# EAGLE board RefOsc10MHz_3V0 (EAGLE 7.2.0)
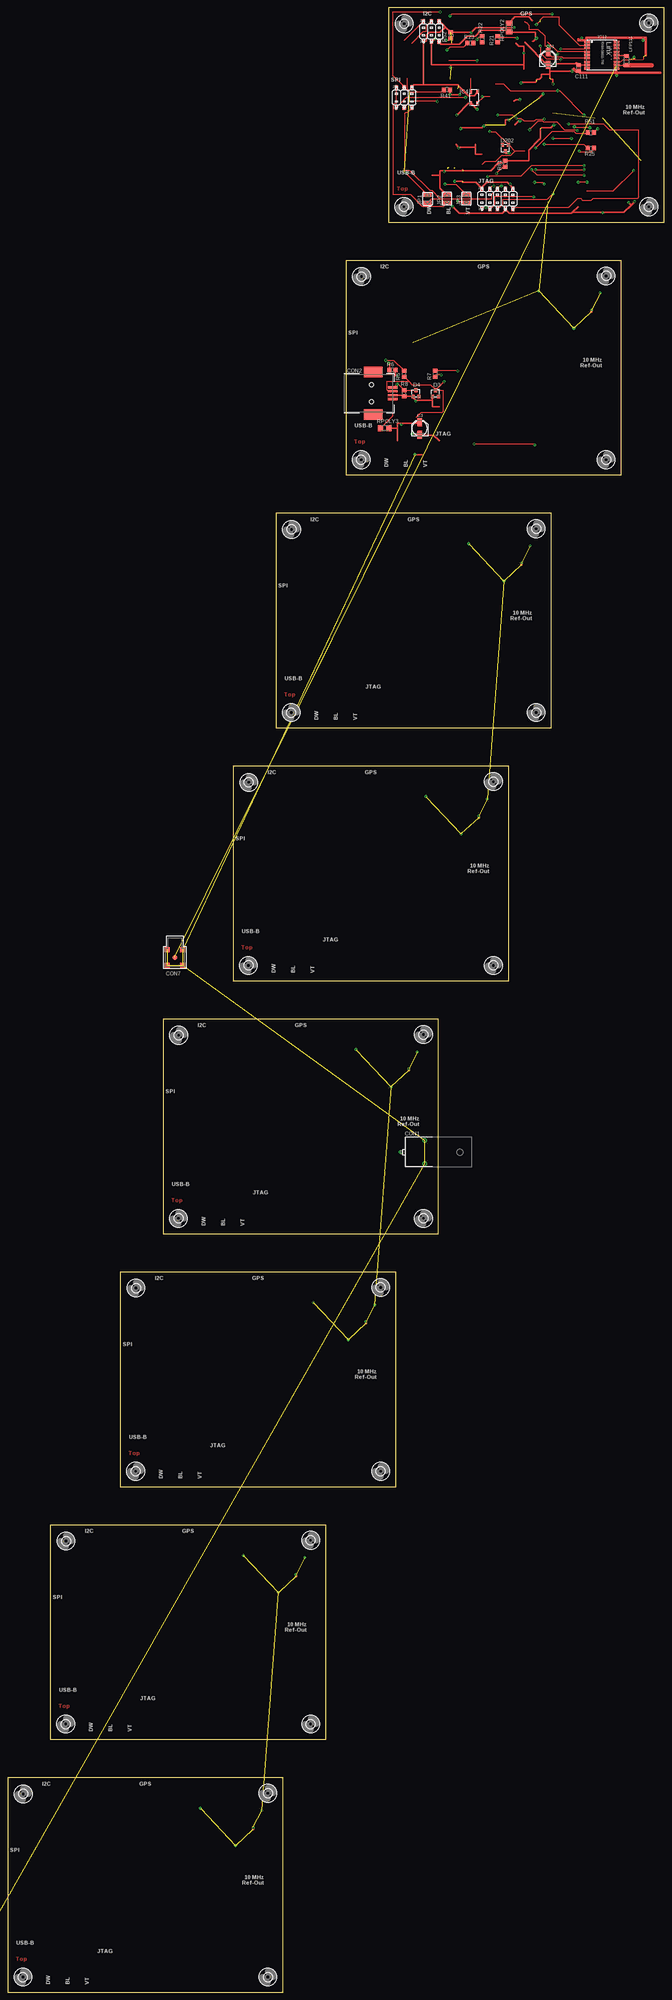
[diagram p0: board, top side]
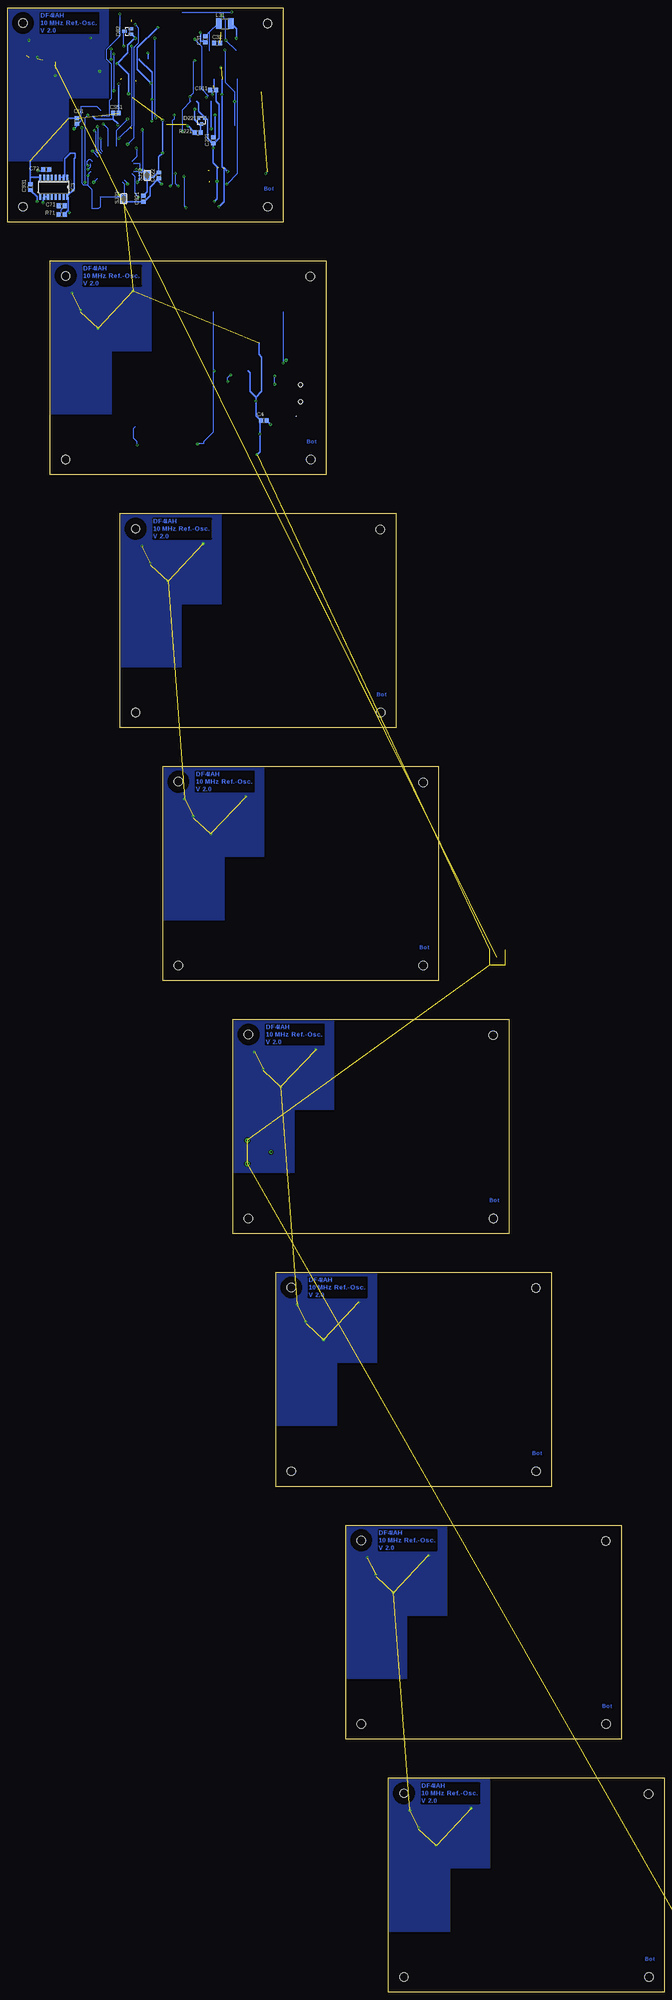
[diagram p1: board, bottom side, seen from below]

Size 214.46 x 647.85 mm. Coordinates in mm from the lower left corner, seen from the top.
Outline: 124.46,577.85 214.46,577.85 214.46,647.85 124.46,647.85 124.46,577.85
Outline: 110.49,495.3 200.49,495.3 200.49,565.3 110.49,565.3 110.49,495.3
Outline: 87.63,412.75 177.63,412.75 177.63,482.75 87.63,482.75 87.63,412.75
Outline: 73.66,330.2 163.66,330.2 163.66,400.2 73.66,400.2 73.66,330.2
Outline: 50.8,247.65 140.8,247.65 140.8,317.65 50.8,317.65 50.8,247.65
Outline: 36.83,165.1 126.83,165.1 126.83,235.1 36.83,235.1 36.83,165.1
Outline: 13.97,82.55 103.97,82.55 103.97,152.55 13.97,152.55 13.97,82.55
Outline: 0,0 90,0 90,70 0,70 0,0
Copper layers (1*16): Top 0.035mm / dielectric 1.5mm / Bottom 0.035mm
Design rules "HSMA_20150114": minimum track width 0.3mm, minimum drill 0.35mm, track to track 0.3mm, track to pad 0.3mm, pad to pad 0.3mm, via to via 0.3mm, smd to smd 0mil, copper to edge 0.3mm, drill to drill 0.35mm, minimum pad ring 0.3mm, minimum via ring 0.25mm, stop-mask expansion 0mil, vias tented up to drill 0.45mm, thermal gap 0.3mm
Net classes: 1 PWR_LOW: width 0.508 mm; 2 PWR_MED: width 0.635 mm; 3 PWR_HI: width 0.762 mm; 4 PAIR_50R: width 2.819 mm, clearance 5.08 mm; 5 PAIR_100R: width 1.143 mm, clearance 3.81 mm; 6 CLK: clearance 1.27 mm
bRestrict: area 174,589.3 to 186.7,602; area 194.3,588 to 204.5,590.6; area 160,506.7 to 172.7,519.4; area 180.3,505.5 to 190.5,508; area 137.2,424.2 to 149.9,436.9; area 157.5,422.9 to 167.6,425.5; area 123.2,341.6 to 135.9,354.3; area 143.5,340.4 to 153.7,342.9; area 100.3,259.1 to 113,271.8; area 120.6,257.8 to 130.8,260.4; area 86.4,176.5 to 99.1,189.2; area 106.7,175.3 to 116.8,177.8; area 63.5,94 to 76.2,106.7; area 83.8,92.7 to 94,95.2; area 49.5,11.4 to 62.2,24.1; area 69.8,10.2 to 80,12.7

## Footprints (pad centres in the part's own frame; a part is rotated, then mirrored left to right if it is on the bottom)
PANASONIC_C = smd 2.6 x 1.4: + 2.05,0; - -2.05,0
C0805 = smd 1.3 x 1.5: 1 -0.95,0; 2 0.95,0
MOLEX_BNC-JACK-50R_SD-73100-0105 = drill 0.46: 1 12.4,0 | drill 0.9: 2 4.6,3.8; 3 4.6,-3.8
TYCO-AMP_USB-B_SMT = smd 6.04 x 3.4: 0A 0,6.92; 0B 0,-6.92 | smd 3 x 0.7: 1 -6.42,1.87; 2 -6.42,-0.62; 3 -6.42,-1.87; 4 -6.42,0.62 | hole 1.4: 0.58,-2.75; 0.58,2.75
MCX-J-P-X-RA-SM1 = smd 1.6 x 1.6: 1 0,0; 2 -2.54,2.54; 3 2.54,2.54; 4 -2.54,-2.54; 5 2.54,-2.54
2X3SMD = smd 1 x 1.5: 1 -2.54,-3.25; 2 -2.54,3.25; 3 0,-3.25; 4 0,3.25; 5 2.54,-3.25; 6 2.54,3.25
2X5SMD = smd 1 x 1.5: 1 -5.08,-3.25; 2 -5.08,3.25; 3 -2.54,-3.25; 4 -2.54,3.25; 5 0,-3.25; 6 0,3.25; 7 2.54,-3.25; 8 2.54,3.25; 9 5.08,-3.25; 10 5.08,3.25
2X03SMD = smd 1 x 1.5: 1 -2.54,-3.25; 2 -2.54,3.25; 3 0,-3.25; 4 0,3.25; 5 2.54,-3.25; 6 2.54,3.25
TO236 = smd 1 x 1.2: A -1,-1; C 0,1; NC 1,-1
SOT23 = smd 1 x 1.4: 1 -0.95,-1.1; 2 0.95,-1.1; 3 0,1.1
SO16 = smd 0.66 x 2.032: 1 -4.445,-3.073; 2 -3.175,-3.073; 3 -1.905,-3.073; 4 -0.635,-3.073; 5 0.635,-3.073; 6 1.905,-3.073; 7 3.175,-3.073; 8 4.445,-3.073; 9 4.445,3.073; 10 3.175,3.073; 11 1.905,3.073; 12 0.635,3.073; 13 -0.635,3.073; 14 -1.905,3.073; 15 -3.175,3.073; 16 -4.445,3.073
CFPT-141 = smd 1.4 x 0.9: 1 -1.9,-1.15; 2 1.9,-1.15; 3 1.9,1.15; 4 -1.9,1.15
712-RXM-GNSS-TM-B = smd 1.803 x 0.711: 1 -4.847,4.369; 2 -4.847,3.277; 3 -4.847,2.184; 4 -4.847,1.092; 5 -4.847,0; 6 -4.847,-1.092; 7 -4.847,-2.184; 8 -4.847,-3.277; 9 -4.847,-4.369; 10 4.847,-4.369; 11 4.847,-3.277; 12 4.847,-2.184; 13 4.847,-1.092; 14 4.847,0; 15 4.847,1.092; 16 4.847,2.184; 17 4.847,3.277; 18 4.847,4.369
SJW = smd 1.27 x 2.54: 1 -1.27,0; 2 1.27,0
L1812 = smd 1.9 x 3.4: 1 -1.95,0; 2 1.95,0
L3216C = smd 1.2 x 1.6: 1 -1.5,0; 2 1.5,0
R0805 = smd 1.3 x 1.5: 1 -0.95,0; 2 0.95,0
M1206 = smd 1.6 x 2: 1 -1.4,0; 2 1.4,0
SJ = smd 1.168 x 1.6: 1 -0.762,0; 2 0.762,0
TQ144 = smd 1.6 x 0.3: P1 -11.1,8.75; P2 -11.1,8.25; P3 -11.1,7.75; P4 -11.1,7.25; P5 -11.1,6.75; P6 -11.1,6.25; P7 -11.1,5.75; P8 -11.1,5.25; P9 -11.1,4.75; P10 -11.1,4.25; P11 -11.1,3.75; P12 -11.1,3.25; P13 -11.1,2.75; P14 -11.1,2.25; P15 -11.1,1.75; P16 -11.1,1.25; P17 -11.1,0.75; P18 -11.1,0.25; P19 -11.1,-0.25; P20 -11.1,-0.75; P21 -11.1,-1.25; P22 -11.1,-1.75; P23 -11.1,-2.25; P24 -11.1,-2.75; P25 -11.1,-3.25; P26 -11.1,-3.75; P27 -11.1,-4.25; P28 -11.1,-4.75; P29 -11.1,-5.25; P30 -11.1,-5.75; P31 -11.1,-6.25; P32 -11.1,-6.75; P33 -11.1,-7.25; P34 -11.1,-7.75; P35 -11.1,-8.25; P36 -11.1,-8.75; P73 11.1,-8.75; P74 11.1,-8.25; P75 11.1,-7.75; P76 11.1,-7.25; P77 11.1,-6.75; P78 11.1,-6.25; P79 11.1,-5.75; P80 11.1,-5.25; P81 11.1,-4.75; P82 11.1,-4.25; P83 11.1,-3.75; P84 11.1,-3.25; P85 11.1,-2.75; P86 11.1,-2.25; P87 11.1,-1.75; P88 11.1,-1.25; P89 11.1,-0.75; P90 11.1,-0.25; P91 11.1,0.25; P92 11.1,0.75; P93 11.1,1.25; P94 11.1,1.75; P95 11.1,2.25; P96 11.1,2.75; P97 11.1,3.25; P98 11.1,3.75; P99 11.1,4.25; P100 11.1,4.75; P101 11.1,5.25; P102 11.1,5.75; P103 11.1,6.25; P104 11.1,6.75; P105 11.1,7.25; P106 11.1,7.75; P107 11.1,8.25; P108 11.1,8.75 | smd 0.3 x 1.6: P37 -8.75,-11.1; P38 -8.25,-11.1; P39 -7.75,-11.1; P40 -7.25,-11.1; P41 -6.75,-11.1; P42 -6.25,-11.1; P43 -5.75,-11.1; P44 -5.25,-11.1; P45 -4.75,-11.1; P46 -4.25,-11.1; P47 -3.75,-11.1; P48 -3.25,-11.1; P49 -2.75,-11.1; P50 -2.25,-11.1; P51 -1.75,-11.1; P52 -1.25,-11.1; P53 -0.75,-11.1; P54 -0.25,-11.1; P55 0.25,-11.1; P56 0.75,-11.1; P57 1.25,-11.1; P58 1.75,-11.1; P59 2.25,-11.1; P60 2.75,-11.1; P61 3.25,-11.1; P62 3.75,-11.1; P63 4.25,-11.1; P64 4.75,-11.1; P65 5.25,-11.1; P66 5.75,-11.1; P67 6.25,-11.1; P68 6.75,-11.1; P69 7.25,-11.1; P70 7.75,-11.1; P71 8.25,-11.1; P72 8.75,-11.1; P109 8.75,11.1; P110 8.25,11.1; P111 7.75,11.1; P112 7.25,11.1; P113 6.75,11.1; P114 6.25,11.1; P115 5.75,11.1; P116 5.25,11.1; P117 4.75,11.1; P118 4.25,11.1; P119 3.75,11.1; P120 3.25,11.1; P121 2.75,11.1; P122 2.25,11.1; P123 1.75,11.1; P124 1.25,11.1; P125 0.75,11.1; P126 0.25,11.1; P127 -0.25,11.1; P128 -0.75,11.1; P129 -1.25,11.1; P130 -1.75,11.1; P131 -2.25,11.1; P132 -2.75,11.1; P133 -3.25,11.1; P134 -3.75,11.1; P135 -4.25,11.1; P136 -4.75,11.1; P137 -5.25,11.1; P138 -5.75,11.1; P139 -6.25,11.1; P140 -6.75,11.1; P141 -7.25,11.1; P142 -7.75,11.1; P143 -8.25,11.1; P144 -8.75,11.1
2,8 = hole 2.8: 0,0

## Placement (x,y rotation side)
C3  47uF  [PANASONIC_C]  134.62,510.54 90 top
C4  100n  [C0805]  130.81,513.08 180 bottom
C31  100n  [C0805]  149.86,637.54 90 bottom
C32  100p  [C0805]  146.05,636.27 0 bottom
C51  10n  [C0805]  191.77,610.87 90 bottom
C71  10p  [C0805]  196.85,583.18 0 bottom
C72  33p  [C0805]  201.87,594.96 180 bottom
C81  0.22F  [PANASONIC_C]  176.53,631.19 90 top
C111  100n  [C0805]  186.45,628.15 270 top
C221  100n  [C0805]  147.32,604.52 270 bottom
C911  10n  [C0805]  147.32,621.03 0 bottom
C921  10n  [C0805]  170.18,585.47 270 bottom
C922  10n  [C0805]  165.1,593.09 270 bottom
C931  10n  [C0805]  207.01,589.28 90 bottom
C951  10n  [C0805]  179.07,613.41 0 bottom
CON1  SD-73100-0105  [MOLEX_BNC-JACK-50R_SD-73100-0105]  140.8,274.27 180 top
CON2  TYCO-AMP_USBUSB-B_SMT  [TYCO-AMP_USB-B_SMT]  119.38,521.97 180 top
CON3  MCX-J-P-X-RA-SM1  [MCX-J-P-X-RA-SM1]  -19.05,0 0 top  (outside the outline)
CON4  AVR-ISP-6SMD  [2X3SMD]  129.54,618.49 0 top
CON5  AVR-JTAG-10SMD  [2X5SMD]  160.02,585.47 0 top
CON6  HEADER-2X3SMD  [2X03SMD]  138.43,640.08 0 top
CON7  MCX-J-P-X-RA-SM1  [MCX-J-P-X-RA-SM1]  54.61,337.82 0 top
CON8  MCX-J-P-X-RA-SM1  [MCX-J-P-X-RA-SM1]  -27.94,0 0 top  (outside the outline)
CON9  MCX-J-P-X-RA-SM1  [MCX-J-P-X-RA-SM1]  -36.83,0 0 top  (outside the outline)
CON10  MCX-J-P-X-RA-SM1  [MCX-J-P-X-RA-SM1]  -45.72,0 0 top  (outside the outline)
D3  BZX84-C3V6  [TO236]  139.7,521.97 0 top
D4  BZX84-C3V6  [TO236]  133.35,521.97 0 top
D82  CRS08  [SOT23]  175.26,640.08 90 bottom
D202  BZX84-C2V7  [TO236]  162.56,601.98 180 top
D221  BZX84-C3V0  [TO236]  151.13,610.87 180 bottom
IC3  74HCT221D  [SO16]  199.39,589.28 180 bottom
IC4  CFPT-141  [CFPT-141]  152.4,618.49 90 top
IC11  712-RXM-GNSS-TM-B  [712-RXM-GNSS-TM-B]  194.1,632.38 0 top
JP1  [SJW]  137.16,585.47 270 top
JP2  [SJW]  143.51,585.47 90 top
JP3  [SJW]  149.86,585.47 90 top
L31  10uH  [L1812]  143.51,642.62 0 bottom
LFP111  WE-CBF_300R  [L3216C]  202.07,630.62 270 top
R5  68  [R0805]  129.54,528.32 90 top
R6  68  [R0805]  125.73,529.59 180 top
R7  1.5k  [R0805]  139.7,528.32 90 top
R8  1M  [R0805]  129.54,521.97 90 top
R10  51  [R0805]  -46.99,-35.56 0 top  (outside the outline)
R21  2.7k  [R0805]  160.02,637.54 90 top
R22  2.7k  [R0805]  154.94,637.54 270 top
R23  2.7k  [R0805]  151.13,636.27 180 top
R25  2.7k  [R0805]  190.5,601.98 0 top
R41  12k  [R0805]  143.51,621.03 180 top
R51  1k  [R0805]  190.5,607.06 0 top
R52  1k  [R0805]  144.78,638.81 270 top
R71  1.5k  [R0805]  196.85,580.39 0 bottom
R81  1k  [R0805]  162.56,596.9 90 top
R221  56  [R0805]  152.4,607.06 0 bottom
RPOLY2  1206L012WR_0.1A  [M1206]  163.83,641.35 270 top
RPOLY3  1206L025YR_0.5A  [M1206]  123.19,510.54 0 top
SJ21  [SJ]  176.53,585.47 90 bottom
SJ22  [SJ]  168.91,593.09 270 bottom
U1  6SLX4TQG144  [TQ144]  -36.83,-50.8 0 top  (outside the outline)
U$1  [2,8]  209.46,642.85 0 top
U$2  [2,8]  209.46,582.85 0 top
U$3  [2,8]  129.46,582.85 180 top
U$4  [2,8]  129.54,642.62 0 top
U$5  [2,8]  195.49,560.3 0 top
U$6  [2,8]  195.49,500.3 0 top
U$7  [2,8]  115.49,500.3 180 top
U$8  [2,8]  115.57,560.07 0 top
U$9  [2,8]  172.63,477.75 0 top
U$10  [2,8]  172.63,417.75 0 top
U$11  [2,8]  92.63,417.75 180 top
U$12  [2,8]  92.71,477.52 0 top
U$13  [2,8]  158.66,395.2 0 top
U$14  [2,8]  158.66,335.2 0 top
U$15  [2,8]  78.66,335.2 180 top
U$16  [2,8]  78.74,394.97 0 top
U$17  [2,8]  135.8,312.65 0 top
U$18  [2,8]  135.8,252.65 0 top
U$19  [2,8]  55.8,252.65 180 top
U$20  [2,8]  55.88,312.42 0 top
U$21  [2,8]  121.83,230.1 0 top
U$22  [2,8]  121.83,170.1 0 top
U$23  [2,8]  41.83,170.1 180 top
U$24  [2,8]  41.91,229.87 0 top
U$25  [2,8]  98.97,147.55 0 top
U$26  [2,8]  98.97,87.55 0 top
U$27  [2,8]  18.97,87.55 180 top
U$28  [2,8]  19.05,147.32 0 top
U$29  [2,8]  85,65 0 top
U$30  [2,8]  85,5 0 top
U$31  [2,8]  5,5 180 top
U$32  [2,8]  5.08,64.77 0 top

## Library data of the parts
C3 C4 C31 C32 C51 C71 C72 C81 C221 C911 C921 C922 C931 C951 L31 R5-R8 R10 R21-R23 R25 R41 R51 R52 R71 R81 R221 RPOLY2 RPOLY3 = rcl
C111 CON3 CON5-CON10 IC11 LFP111 = df4iah
CON1 = df4iah; MF: MOLEX; MPN: SD-73100-0105; OC_FARNELL: 1909203; OC_NEWARK: -
CON2 = df4iah; MF: TYCO-AMP; MPN: 1734346; OC_FARNELL: 1321918
CON4 = atmel-1
D3 D4 D82 D202 D221 = diode
IC3 = 74xx-eu
IC4 = df4iah; MF: IQD-FREQUENCY-PRODUCTS; MPN: LFTVXO022175; OC_FARNELL: 1100745; OC_NEWARK: -
JP1-JP3 SJ21 SJ22 = jumper
U1 = xilinx_devices_V6
U$1-U$32 = holes

## Nets
14 [PWR_HI]: IC11.14 LFP111.1
+3V0 [PWR_LOW]: C221.1 D221.C IC4.4 R221.2
+3V3 [PWR_LOW]: C921.1 C922.1 CON6.5 D82.1 D202.C R221.1 RPOLY2.2 SJ22.2
ADC_PHASE: R52.2
ADC_PHASE_PULLHOLD: C51.1 R51.2
AREF: C32.1
AVCC: C31.2 L31.1
CPLD_GPS_NMEA_TX: R25.2
GND [PWR_HI]: C3.- C4.2 C31.1 C32.2 C51.2 C81.- C111.2 C221.2 C911.2 C921.2 C922.2 C931.2 C951.2 CON1.2 CON1.3 CON2.4 CON3.2 CON3.3 CON3.4 CON3.5 CON4.6 CON5.2 CON5.10 CON6.1 CON6.6 CON7.2 CON7.3 CON7.4 CON7.5 CON8.2 CON8.3 CON8.4 CON8.5 CON9.2 CON9.3 CON9.4 CON9.5 CON10.2 CON10.3 CON10.4 CON10.5 D3.A D4.A D221.A IC3.8 IC4.2 IC11.1 IC11.10 IC11.12 JP3.1 R8.1 R52.1 SJ21.1 U1.P3 U1.P13 U1.P25 U1.P49 U1.P54 U1.P68 U1.P77 U1.P91 U1.P96 U1.P108 U1.P113 U1.P130 U1.P136
GND_SJ1: SJ21.2
GPS_ANT_PWR [PWR_MED]: RPOLY2.1
GPS_HF [PAIR_50R]: CON7.1 IC11.11 LFP111.2
GPS_NMEA_RX: IC11.3
GPS_NMEA_TX: IC11.2 R25.1
GPS_PPS: IC11.4
INT1: JP3.2
ISP_MISO: CON4.1 R22.1
ISP_MOSI: CON4.4
ISP_SCK: CON4.3 R23.2
ISP_VTARGET: CON4.2 JP2.1
JTAG_SRST: CON4.5 CON5.6 JP1.2 R21.2
JTAG_TCK: CON5.1
JTAG_TDI: CON5.9
JTAG_TDO: CON5.3
JTAG_TMS: CON5.5
JTAG_VREF: CON5.4 R81.1
MISO: R22.2
N$1: CON6.2
N$3: CON6.4
N$44: C72.2
N$45: C72.1
N$47: C71.2 R71.1
N$48: C71.1
N_ADC_PULL: D202.A IC4.1
PHASE_ERROR: R51.1
PWR_3V3_GPS [PWR_HI]: C111.1 IC11.8
PWR_BACKUP_GPS [PWR_LOW]: C81.+ D82.3 IC11.6
REFC_10MHZ: CON1.1
RESET: JP1.1 R41.2
SIG_CH0_I: CON3.1
SIG_CH0_Q: CON8.1
SIG_CH1_I: CON9.1
SIG_CH1_Q: CON10.1
SS: R21.1
TOSC1: IC4.3
USB_5V [PWR_HI]: C3.+ C4.1 RPOLY3.2
USB_D_MIN1: CON2.2 D3.C R5.1 R7.1
USB_D_MNS: R5.2
USB_D_PLS: R6.2
USB_D_PLS1: CON2.3 D4.C R6.1 R8.2
USB_DISC: R7.2
USB_PWR1: CON2.1 RPOLY3.1
VCC [PWR_MED]: C911.1 C931.1 C951.1 CON5.7 CON6.3 IC3.16 JP2.2 L31.2 R41.1 R71.2 R81.2
VCC_3V3_SJ2: SJ22.1

## Tracks (layer width: path | path; a pad name or v marks a point on that pad's centre or on a via)
14
  Top 0.406: IC11.14 202.03,632.38 LFP111.1
+3V0  (via drill 0.35)
  Top 0.508: v153.35,614.68 151.45,616.59 IC4.4 151.13,616.59 150.5,616.59 v146.69,612.77
  Bottom 0.508: 151.45,609.28 151.13,609.6 D221.C 151.45,609.28 | 151.45,609.28 R221.2 | v153.35,614.68 153.35,611.19 151.45,609.28 | v146.69,612.77 146.69,606.11 C221.1
+3V3  (via drill 0.35)  (2 unrouted)
  Top 0.508: 171.45,636.9 171.77,636.9 v172.72,637.86 172.4,637.86 172.4,639.76 163.83,639.76 RPOLY2.2 163.83,640.08 163.51,640.4 154.62,640.4 152.72,638.49 150.18,638.49 147.64,635.95 141.6,635.95 140.97,636.59 CON6.5 | v178.75,629.6 185.74,629.6 | 156.21,609.6 155.89,609.28 v155.57,609.28 154.94,608.65 148.27,608.65 v147.95,608.33 | v163.83,600.39 162.88,600.39 162.56,600.71 D202.C | 162.56,609.6 162.56,611.19 v163.83,611.19 | 173.67,618.49 v174.94,619.76
  Bottom 0.508: D82.1 173.99,639.13 v172.72,637.86 173.04,637.86 175.26,635.63 175.26,633.1 v178.75,629.6 178.44,629.6 174.94,626.11 v174.94,619.76 | v155.57,609.28 R221.1 | v147.95,608.33 147.95,617.22 | C921.1 168.91,587.69 SJ22.2 168.91,592.46 166.69,592.46 166.69,592.77 165.1,594.36 | 165.1,594.36 C922.1 | 165.1,594.36 165.1,599.12 v163.83,600.39 v163.83,611.19
ADC_PHASE  (via drill 0.35)
  Top 0.3: v143.19,637.22 144.14,637.22 R52.2 | v177.8,645.8 145.1,645.8 v144.46,645.16
  Bottom 0.3: 139.7,633.73 v143.19,637.22 143.19,643.89 v144.46,645.16 | 183.83,612.46 181.29,612.46 181.29,617.54 180.66,618.17 180.66,629.6 182.25,631.19 182.25,634.05 177.8,638.49 v177.8,645.8
ADC_PHASE_PULLHOLD  (via drill 0.35)
  Top 0.3: v192.72,608.33 R51.2
  Bottom 0.3: 184.15,614.36 185.42,615.63 190.5,615.63 190.5,610.87 191.13,610.24 191.77,610.24 C51.1 191.77,609.28 v192.72,608.33
AREF
  Bottom 0.3: 147.32,635.95 C32.1
AVCC
  Bottom 0.3: 148.59,639.76 145.73,642.62 L31.1 | 148.59,639.76 C31.2 | 148.59,639.76 148.59,633.73
CPLD_GPS_NMEA_TX  (via drill 0.35)
  Top 0.3: v186.69,601.03 187.01,600.71 190.5,600.71 191.13,601.35 191.13,601.98 R25.2
  Bottom 0.3: 185.1,599.12 185.74,599.76 185.74,600.08 v186.69,601.03
GND  (via drill 0.35)  (55 unrouted)
  Top 0.406: 207.61,631.66 207.61,631.06 202.99,630.82 201.03,630.84 200.1,630.19 199.66,630.2 IC11.12
  Top 0.508: 165.42,617.22 166.05,617.86 v167.32,617.86 | 165.73,609.6 167,610.87 v167.32,610.87 | 172.72,623.89 172.4,623.57 167.64,623.57 v167.64,623.25 | 177.16,627.06 177.16,628.97 176.53,628.97 C81.- 176.53,629.29 176.21,629.29 168.91,636.59 | 177.16,627.06 177.16,626.11 | 177.16,626.11 177.16,624.84 | v178.12,622.94 178.12,624.52 177.48,624.52 | 172.72,624.21 173.04,624.52 173.67,624.52 174.31,625.16 174.31,626.11 177.16,626.11 | 177.16,627.06 184.15,627.06 v184.38,627.09 | 143.03,641.51 141.29,643.25 140.97,643.25 CON6.6 | 143.03,641.51 R52.1 | R52.1 v151.45,639.76 153.03,641.35 v165.42,641.35 | R52.1 | 143.03,641.51 141.29,639.76 137.79,639.76 136.84,638.81 136.84,636.9 135.89,636.9 CON6.1 135.89,622.62 | 148.59,590.87 153.03,590.87 154.94,588.96 CON5.2 154.94,589.28 156.53,590.87 163.19,590.87 163.99,590.07 | 163.99,590.07 165.1,588.96 CON5.10 | v164.15,590.23 163.99,590.07 | 152.72,602.3 152.72,600.08 154.94,600.08 | 152.72,602.3 152.72,603.25 | 147.32,602.3 152.72,602.3 | 146.37,603.25 147.32,602.3 | JP3.1 149.54,584.52 v147,584.52 | v147.32,601.98 147.32,602.3 | v146.05,591.19 148.59,591.19 | IC4.2 153.35,620.08 152.4,619.12 150.5,619.12 147.32,622.3 147.32,622.62 135.89,622.62 | 135.89,622.62 132.72,622.62 132.08,621.98 CON4.6 | 140.97,506.41 139.06,508.32 134.62,508.32 C3.- 134.62,508.63 v132.08,508.63 | 138.75,519.75 138.75,517.52 140.97,517.52 | 138.75,519.75 138.75,520.7 D3.A | R8.1 132.08,521.02 D4.A 132.4,520.7 133.35,519.75 | 129.54,521.34 R8.1 | 133.35,519.75 138.75,519.75 | v133.03,501.97 135.57,501.97 | v133.35,519.43 133.35,519.75 | CON2.4 125.86,521.3 129.36,521.3 R8.1
  Top 0.762: 213.15,626.67 208.38,626.67 198.86,626.67 | 198.88,626.68 198.87,626.99 | 198.87,626.99 198.86,627.94 | 198.86,627.94 | 189.02,637.15 189.02,636.83 IC11.1 188.7,636.83 | 189.02,637.15 189.02,638.1 208.38,638.1 208.38,637.62 | 208.38,632.38 208.38,637.62 | 198.87,626.99 198.86,626.99 198.86,626.67 | IC11.10 199.18,627.94 198.86,627.94 | 198.86,626.67 186.95,626.67 186.48,627.15 C111.2 | 189.02,637.15 187.43,637.15 | 187.43,637.15 186.48,637.15 186.48,637.46 | 186.16,626.99 C111.2 | 185.13,627.7 185.84,626.99 C111.2 | 185.13,627.7 184.89,627.94 | 204.71,631.59 204.73,631.59 v204.66,631.66 | 187.42,637.16 187.43,637.46 187.43,637.15 | 198.91,626.36 198.86,626.35 198.86,626.67 | 184.67,627.59 184.89,627.46 185.13,627.7 | 207.99,637.71 208.07,637.62 208.38,637.62 | 190.74,549.04 190.76,549.04 v190.69,549.12
  Top 0.813: 184.39,627.11 184.67,627.59 184.79,627.79 | 187.42,637.94 187.42,637.16 | 207.46,637.21 207.99,637.71 208.35,638.06 | 198.95,625.73 198.91,626.36 198.89,626.64 | 204.69,631.15 204.71,631.59 204.71,631.66 | 190.72,548.6 190.74,549.04 190.74,549.12
  Bottom 0.508: 167.32,623.25 167.32,626.75 171.45,630.87 171.45,631.19 | 167.32,623.25 v167.32,617.86 v167.32,610.87 | v178.12,622.94 C951.2 | 194.46,611.82 C51.2 | 207.01,597.85 207.01,592.46 | 207.01,592.46 C931.2 | 207.01,592.46 203.83,592.46 IC3.8 | 167.32,623.25 v167.64,623.25 172.08,627.7 172.08,634.68 v165.42,641.35 | 144.78,635.95 C32.2 | 147,624.52 147,621.35 146.69,621.03 C911.2 146.37,617.22 145.41,616.27 145.41,605.15 147.32,603.25 | v151.45,639.76 151.45,636.9 149.86,636.9 C31.1 | SJ21.1 176.53,584.52 C921.2 170.18,584.84 169.54,584.84 167.96,586.42 167.96,589.28 C922.2 165.42,591.5 v164.15,590.23 | 152.72,617.22 152.08,616.59 152.08,614.05 150.18,612.14 D221.A 149.86,611.82 149.22,611.19 149.22,605.15 147.32,603.25 | 145.73,595.63 147.32,597.22 v147.32,601.98 147.32,603.25 | C221.2 147.32,603.25 | v147,584.52 146.05,585.47 v146.05,591.19 146.05,595.63 | 132.4,538.48 132.4,534.67 131.44,533.72 131.44,522.61 133.35,520.7 | 133.35,520.7 v133.35,519.43 133.35,514.67 C4.2 132.08,513.08 v132.08,508.63 132.08,502.92 v133.03,501.97 | 135.89,529.27 135.25,528.64 135.25,522.61 133.35,520.7
  other vias: 207.49,637.21 198.92,625.77 187.45,637.94 193.52,554.66 184.95,543.22 173.48,555.39
  pour Bottom: 181.46,647.85 214.46,647.85 214.46,597.85 194.46,597.85 194.46,618.45 181.46,618.45
  pour Bottom: 167.49,565.3 200.49,565.3 200.49,515.3 180.49,515.3 180.49,535.9 167.49,535.9
GND1  (via drill 0.35)  (7 unrouted)
  Top 0.762: 167.88,466.49 167.9,466.49 v167.83,466.57 | 153.91,383.94 153.93,383.94 v153.87,384.01
  Top 0.813: 167.86,466.05 167.88,466.49 167.88,466.57 | 153.89,383.5 153.91,383.94 153.91,384.01
  other vias: 170.66,472.11 162.09,460.67 150.62,472.84 156.69,389.56 148.12,378.12 136.65,390.29
  pour Bottom: 144.63,482.75 177.63,482.75 177.63,432.75 157.63,432.75 157.63,453.35 144.63,453.35
  pour Bottom: 130.66,400.2 163.66,400.2 163.66,350.2 143.66,350.2 143.66,370.8 130.66,370.8
GND2  (via drill 0.35)  (7 unrouted)
  Top 0.762: 131.05,301.39 131.07,301.39 v131,301.47 | 117.08,218.84 117.1,218.84 v117.03,218.92
  Top 0.813: 131.03,300.95 131.05,301.39 131.05,301.47 | 117.06,218.4 117.08,218.84 117.08,218.92
  other vias: 133.83,307.01 125.26,295.57 113.79,307.74 119.86,224.46 111.29,213.02 99.82,225.19
  pour Bottom: 107.8,317.65 140.8,317.65 140.8,267.65 120.8,267.65 120.8,288.25 107.8,288.25
  pour Bottom: 93.83,235.1 126.83,235.1 126.83,185.1 106.83,185.1 106.83,205.7 93.83,205.7
GND3  (via drill 0.35)  (7 unrouted)
  Top 0.762: 94.22,136.29 94.24,136.29 v94.17,136.37 | 80.25,53.74 80.27,53.74 v80.2,53.82
  Top 0.813: 94.2,135.85 94.22,136.29 94.22,136.37 | 80.23,53.3 80.25,53.74 80.25,53.82
  other vias: 97,141.91 88.43,130.47 76.96,142.64 83.03,59.36 74.46,47.92 62.99,60.09
  pour Bottom: 70.97,152.55 103.97,152.55 103.97,102.55 83.97,102.55 83.97,123.15 70.97,123.15
  pour Bottom: 57,70 90,70 90,20 70,20 70,40.6 57,40.6
GND_SJ1  (via drill 0.35)
  Top 0.3: v171.13,595 173.04,593.09 v188.28,593.09 | v185.1,608.97 185.42,608.65 v190.18,608.65
  Bottom 0.3: 176.85,590.87 176.21,590.23 176.21,586.74 176.53,586.42 SJ21.2 176.53,586.11 184.15,586.11 184.15,582.93 184.78,582.3 187.01,582.3 187.01,588.64 188.28,589.92 | 173.35,596.9 171.13,596.9 v171.13,595 | 187.32,594.36 187.96,593.73 187.96,593.41 v188.28,593.09 188.28,589.92 | 183.83,600.39 185.1,601.66 v185.1,608.97 | v190.18,608.65 190.18,590.55 189.55,589.92 188.28,589.92
GPS_ANT_PWR
  Top 0.508: 171.45,643.57 170.18,644.84 165.73,644.84 163.83,642.94 RPOLY2.1
GPS_HF  (1 unrouted)
  Top 0.3: 199.18,629.1 199.18,629.21 IC11.11 | LFP111.2 202.08,629.1 | 210.58,629.1 210.39,629.09 | 200.86,629.1 200.96,629.1 201.57,629.1
  Top 0.406: IC11.11 199.18,629.1 200.86,629.1
  Top 1.422: 201.57,629.1 202.08,629.1 210.39,629.09
GPS_NMEA_RX  (via drill 0.35)
  Top 0.3: 189.18,634.61 IC11.3 189.23,634.37 v180.66,634.37 | v178.12,605.15 v184.15,605.15 | v180.66,630.87 180.34,631.19 175.89,631.19 173.99,633.1 v173.99,635.32
  Bottom 0.3: 183.51,601.03 184.15,601.66 v184.15,605.15 | v178.12,605.15 173.99,609.28 v173.99,635.32 | v180.66,630.87 v180.66,634.37
GPS_NMEA_TX  (via drill 0.35)  (1 unrouted)
  Top 0.3: 189.18,635.72 IC11.2 | 189.21,635.85 IC11.2 | v175.26,603.25 188.28,603.25 R25.1 | v172.72,642.3 173.67,643.25 173.99,643.25 | 173.99,643.89 174.94,644.84 180.02,644.84 180.02,642.3 186.69,635.63 189.23,635.63 IC11.2
  Bottom 0.3: v175.26,603.25 173.35,605.15 173.35,634.68 171.77,636.27 171.77,641.35 v172.72,642.3
GPS_PPS  (via drill 0.35)
  Top 0.3: 189.18,633.5 IC11.4 | 189.02,633.34 IC11.4 | 188.96,633.48 IC11.4 | 179.7,633.41 176.53,636.59 | 179.7,633.41 188.91,633.41 IC11.4 | v189.23,590.87 v186.37,590.87 | v188.28,612.77 180.34,620.71 v179.7,620.71 164.15,620.71 161.93,622.94 159.38,622.94 | v179.7,632.78 179.7,633.41
  Bottom 0.3: v186.37,590.87 185.1,592.14 | v189.23,590.87 189.23,611.82 v188.28,612.77 | v179.7,620.71 v179.7,632.78
INT1  (via drill 0.35)
  Top 0.3: v142.83,590.23 146.46,590.23 149.83,586.85 JP3.2
  Bottom 0.3: v142.83,590.23 139.46,593.6 139.46,624.6
ISP_MISO  (via drill 0.35)
  Top 0.3: v153.35,637.54 153.99,638.18 154.94,638.18 R22.1 | v149.54,618.49 130.17,618.49 127,615.32 CON4.1
  Bottom 0.3: v153.35,637.54 151.13,635.32 151.13,621.35 148.91,619.12 v149.54,618.49
ISP_MOSI  (via drill 0.35)
  Top 0.3: v141.29,646.43 125.73,646.43 125.73,625.79 129.54,621.98 CON4.4
  Bottom 0.3: 157.48,646.43 v141.29,646.43
ISP_SCK  (via drill 0.35)
  Top 0.3: v143.51,634.05 144.46,635 148.91,635 R23.2 | v140.33,617.22 131.44,617.22 129.54,615.32 CON4.3
  Bottom 0.3: v143.51,634.05 143.51,623.57 143.46,623.48 140.33,620.35 v140.33,617.22 140.33,609.23
ISP_VTARGET
  Top 0.3: CON4.2 127,616.59 126.36,616.59 126.05,616.27 126.05,586.74 131.76,586.74 135.57,582.93 142.24,582.93 JP2.1
JTAG_SRST  (via drill 0.35)
  Top 0.3: v175.26,611.5 172.72,611.5 172.08,610.87 168.59,610.87 167.64,611.82 v166.05,611.82 165.1,612.77 v160.02,612.77 | v166.37,637.86 166.05,638.18 160.02,638.18 R21.2 | 141.29,585.48 138.46,585.48 137.21,584.23 JP1.2 | 141.29,585.48 158.21,585.48 158.21,586.98 159.46,588.23 159.58,588.23 159.96,588.6 CON5.6 160.02,588.96 160.66,589.6 v161.29,589.6 | CON4.5 132.08,615 130.81,613.73 130.17,613.73 129.86,613.41 129.86,594.68 131.44,594.68 138.11,588.01 138.75,588.01 141.29,585.47 141.29,585.48
  Bottom 0.3: 179.07,602.62 179.07,607.7 v175.26,611.5 | v166.05,611.82 166.37,612.14 v166.37,637.86 | v161.29,589.6 160.66,590.23 160.66,610.87 160.02,611.5 v160.02,612.77
JTAG_TCK  (via drill 0.35)
  Top 0.3: v156.21,582.61 155.26,582.61 154.94,582.3 CON5.1 | v156.84,592.77 167.64,592.77 171.13,596.26 v188.28,596.26
  Bottom 0.3: v156.21,582.61 156.84,583.25 v156.84,592.77 | v188.28,596.26 188.59,596.58 188.59,597.53 187.96,598.17 187.32,598.17 186.69,597.53
JTAG_TDI  (via drill 0.35)
  Top 0.3: v183.2,609.92 194.63,609.92 196.53,608.01 206.06,608.01 206.06,585.79 205.74,585.47 191.13,585.47 190.5,584.84 187.96,584.84 187.32,585.47 186.06,585.47 183.2,582.61 165.42,582.61 165.1,582.3 CON5.9
  Bottom 0.3: v183.2,609.92 181.61,608.33 181.61,602.62
JTAG_TDO  (via drill 0.35)
  Top 0.3: v171.77,586.11 159.07,586.11 159.07,583.57 158.12,582.61 157.8,582.61 157.48,582.3 CON5.3
  Bottom 0.3: v171.77,586.11 173.04,587.38 173.04,592.77 173.99,593.73
JTAG_TMS  (via drill 0.35)
  Top 0.3: v178.12,587.06 176.21,585.15 161.61,585.15 161.61,583.57 160.66,582.61 160.34,582.61 160.02,582.3 CON5.5
  Bottom 0.3: v178.12,587.06 179.07,588.01 179.07,588.64
JTAG_VREF  (via drill 0.35)
  Top 0.3: v158.75,589.6 158.12,589.6 157.48,588.96 CON5.4 | v159.7,593.73 161.93,595.95 R81.1
  Bottom 0.3: v158.75,589.6 159.7,590.55 v159.7,593.73
N$1
  Top 0.3: 129.54,637.22 135.25,642.94 135.57,642.94 135.89,643.25 CON6.2
N$3
  Top 0.3: 132.08,636.27 135.89,640.08 136.84,640.08 136.84,641.99 137.79,642.94 138.11,642.94 138.43,643.25 CON6.4
N$44  (via drill 0.35)
  Top 0.3: v204.47,594.68 197.8,588.01 189.23,588.01
  Bottom 0.3: 202.56,594.68 C72.2 202.88,594.68 v204.47,594.68
N$45
  Bottom 0.3: 201.29,594.36 200.98,594.68 C72.1
N$47
  Bottom 0.3: R71.1 197.49,580.39 197.17,580.71 197.17,581.66 196.21,582.61 196.21,582.93 C71.2 196.21,583.25
N$48
  Bottom 0.3: 197.49,583.25 C71.1
N_ADC_PULL  (via drill 0.35)
  Top 0.3: 165.73,601.03 163.83,602.93 D202.A 163.51,603.25 159.38,607.38 v157.48,607.38 | 168.91,601.03 165.73,601.03 | 154.94,596.58 155.89,597.53 159.38,597.53 161.29,599.44 164.15,599.44 165.73,601.03 | 155.26,618.49 155.57,618.81 157.48,618.81 | 155.26,618.49 153.67,616.9 IC4.1 | 155.26,618.49 v154.94,618.81 | v153.35,630.56 144.14,630.56
  Bottom 0.3: v153.35,630.56 153.67,630.24 153.67,620.08 v154.94,618.81 154.94,617.54 154.62,617.22 157.48,614.36 v157.48,607.38
PHASE_ERROR  (via drill 0.35)
  Top 0.3: v172.4,601.98 177.8,607.38 185.1,607.38 185.74,606.74 189.23,606.74 R51.1
  Bottom 0.3: 173.99,597.53 172.4,599.12 v172.4,601.98
PWR_3V3_GPS
  Top 0.406: IC11.8 189.24,629.1 C111.1
  Top 0.762: 186.32,629.21 C111.1 | 186.16,629.53 C111.1 | 185.83,629.73 C111.1
PWR_BACKUP_GPS  (via drill 0.35)
  Top 0.3: 189.18,631.43 IC11.6 | 189.02,631.43 IC11.6 | 168.91,643.25 169.23,642.94 169.54,642.94 170.5,641.99 170.5,640.72 173.35,640.72 175.58,638.49 175.58,635.32 v176.53,635.32 C81.+ 176.53,633.1 177.8,631.83 180.97,631.83 181.29,631.51 188.91,631.51 IC11.6
  Bottom 0.3: v176.53,635.32 176.53,640.08 D82.3
RESET  (via drill 0.35)  (1 unrouted)
  Top 0.3: 130.49,624.84 130.49,621.35 131.44,620.39 141.92,620.39 R41.2 | v130.17,593.73 JP1.1
  Bottom 0.3: 129.54,594.36 v130.17,593.73
TOSC1
  Top 0.3: 151.13,624.84 151.13,620.39 IC4.3
USB_5V  (via drill 0.35)
  Top 0.508: 127.32,510.55 127.32,512.13 128.59,512.13 | 127.32,510.55 127.32,506.41 | 128.59,512.13 134.62,512.13 C3.+ | 128.59,512.13 v128.59,511.81 | 127.32,510.55 124.61,510.55 RPOLY3.2
  Bottom 0.508: v128.59,511.81 C4.1
USB_D_MIN1  (via drill 0.35)
  Top 0.3: 139.7,523.24 138.11,524.83 132.08,524.83 131.05,525.86 | 131.05,525.86 R5.1 | v141.6,528 140.02,528 139.7,527.69 R7.1 | v142.56,525.78 140.02,523.24 139.7,523.24 | 139.7,523.24 D3.C 139.7,522.92 142.24,522.92 142.24,515.94 141.92,515.62 134.94,515.62 133.35,514.03 | CON2.2 125.74,522.68 125.49,522.93 124.11,522.93 123.74,523.3 123.74,525.8 130.99,525.8 131.05,525.86
  Bottom 0.3: v141.6,528 142.56,527.05 v142.56,525.78
USB_D_MNS  (via drill 0.35)
  Top 0.3: 129.22,529.59 R5.2 129.22,529.59 | 129.22,529.59 126.05,532.76 v123.51,532.76
  Bottom 0.3: 123.19,533.08 v123.51,532.76
USB_D_PLS  (via drill 0.35)
  Top 0.3: v124.46,531.81 124.78,531.81 R6.2
  Bottom 0.3: 124.46,548.64 v124.46,531.81
USB_D_PLS1  (via drill 0.35)
  Top 0.3: D4.C 133.35,522.92 R8.2 129.49,523.05 127.61,524.93 v127.24,524.93 126.24,523.93 125.86,523.93 CON2.3 | v127.24,527.55 126.74,527.55 126.74,529.55 R6.1
  Bottom 0.3: v127.24,524.93 v127.24,527.55
USB_DISC  (via drill 0.35)
  Top 0.3: v147,529.27 R7.2 | v172.08,505.14 171.77,505.46 v152.4,505.46
  Bottom 0.3: 147.32,529.59 v147,529.27 | 147.32,548.64 147.32,529.59 | 172.72,511.18 173.35,510.54 173.35,507.37 172.08,506.1 v172.08,505.14 | v152.4,505.46 150.5,505.46 150.5,506.1 147.32,509.27 147.32,529.59
USB_PWR1
  Top 0.3: RPOLY3.1 121.86,510.55 125.74,514.43 125.74,520.05 CON2.1
VCC  (via drill 0.35)  (5 unrouted)
  Top 0.508: 186.37,582.93 184.63,581.18 | 184.63,581.18 184.15,580.71 163.83,580.71 162.56,581.98 CON5.7 162.56,581.66 161.61,580.71 147.64,580.71 v145.41,582.93 | 203.68,583.41 201.29,581.02 v194.31,581.02 184.78,581.02 184.63,581.18 | 203.68,583.41 v204.79,584.52 | 203.68,583.41 v202.88,584.2 | 168.59,629.29 v168.59,633.1 168.59,635.32 167,635.32 166.05,636.27 | 168.59,629.29 168.59,627.7 | 168.59,629.29 144.78,629.29 | 144.78,629.29 138.43,629.29 CON6.3 138.43,636.9 138.75,636.9 v139.7,637.86 | R41.1 v144.46,619.44 v147.64,619.44 | 148.59,595 148.91,594.68 157.8,594.68 160.34,597.22 162.24,597.22 162.56,597.53 R81.2 170.18,597.85 170.18,601.35 173.67,604.84 173.99,604.84 173.99,608.33 | JP2.2 141.29,588.96 141.29,593.1 | 141.29,593.1 141.29,594.68 142.56,594.68 | 148.59,594.68 142.56,594.68 | v178.44,609.6 177.48,608.65 174.31,608.65 | 142.56,594.68 v142.56,594.36 | v144.78,628.33 144.78,629.29 | 141.29,593.1 138.58,593.1
  Bottom 0.508: 197.49,592.46 196.21,592.46 195.9,592.77 195.9,598.49 193.99,600.39 192.4,600.39 192.4,598.81 192.72,598.49 192.72,588.64 194.94,586.42 IC3.16 194.94,586.11 194.63,585.79 194.63,581.66 194.79,581.5 | 194.79,581.5 R71.2 | 201.29,586.11 202.56,586.11 202.88,585.79 v202.88,584.2 | v204.79,584.52 204.79,586.11 C931.1 | v194.31,581.02 194.79,581.5 | v168.59,633.1 168.59,631.19 | v139.7,637.86 139.7,641.03 141.29,642.62 L31.2 | 144.14,595.63 144.46,595.95 v144.46,619.44 144.46,624.52 | v147.64,619.44 147.64,620.71 147.95,621.03 C911.1 | 186.69,612.46 185.74,611.5 180.02,611.5 | 180.02,611.5 C951.1 | 180.02,611.5 178.44,609.92 v178.44,609.6 | v142.56,594.36 143.83,595.63 | v145.41,582.93 143.83,584.52 143.83,595.31
VCC_3V3_SJ2  (via drill 0.35)
  Top 0.3: v175.26,590.23 174.62,590.87 v172.08,590.87 | v186.06,607.7 185.74,608.01 181.93,608.01 179.39,610.55 174.94,610.55 174.62,610.87 173.35,610.87 v170.5,608.01 | v172.4,595 v188.28,595
  Bottom 0.3: 172.4,594.36 171.77,594.36 171.45,594.04 | 172.4,594.36 173.35,594.36 | 170.18,594.04 168.91,594.04 SJ22.1 | 170.18,594.04 171.45,594.04 | 176.21,591.5 175.26,590.55 v175.26,590.23 | v172.08,590.87 171.45,591.5 171.45,594.04 | 184.47,599.76 185.74,601.03 185.74,607.38 v186.06,607.7 | v170.5,608.01 170.18,607.7 170.18,594.04 | 187.32,596.9 187.32,595.95 v188.28,595 | 172.4,594.36 v172.4,595

## Text on the board
Top: Top | Top | Top | Top | Top | Top | Top | Top
Bottom: DF4IAH / 10 MHz Ref.-Osc. / V 2.0 | Bot | DF4IAH / 10 MHz Ref.-Osc. / V 2.0 | Bot | DF4IAH / 10 MHz Ref.-Osc. / V 2.0 | Bot | DF4IAH / 10 MHz Ref.-Osc. / V 2.0 | Bot | DF4IAH / 10 MHz Ref.-Osc. / V 2.0 | Bot | DF4IAH / 10 MHz Ref.-Osc. / V 2.0 | Bot | DF4IAH / 10 MHz Ref.-Osc. / V 2.0 | Bot | DF4IAH / 10 MHz Ref.-Osc. / V 2.0 | Bot
tPlace: I2C | GPS | SPI | 10 MHz / Ref-Out | USB-B | JTAG | DW | BL | VT | I2C | GPS | SPI | 10 MHz / Ref-Out | USB-B | JTAG | DW | BL | VT | I2C | GPS | SPI | 10 MHz / Ref-Out | USB-B | JTAG | DW | BL | VT | I2C | GPS | SPI | 10 MHz / Ref-Out | USB-B | JTAG | DW | BL | VT | I2C | GPS | SPI | 10 MHz / Ref-Out | USB-B | JTAG | DW | BL | VT | I2C | GPS | SPI | 10 MHz / Ref-Out | USB-B | JTAG | DW | BL | VT | I2C | GPS | SPI | 10 MHz / Ref-Out | USB-B | JTAG | DW | BL | VT | I2C | GPS | SPI | 10 MHz / Ref-Out | USB-B | JTAG | DW | BL | VT